# Altium PCB PCB2_2020-05-13_13-22-51.pcbdoc
Units mil, origin at the board's own origin, x right, y up, seen from the top; angles counter-clockwise.
Board outline 3580 x 4000 mil, 2 copper layers (Top Layer, Bottom Layer); 90 components, 122 nets, 302 pads, 72 vias.
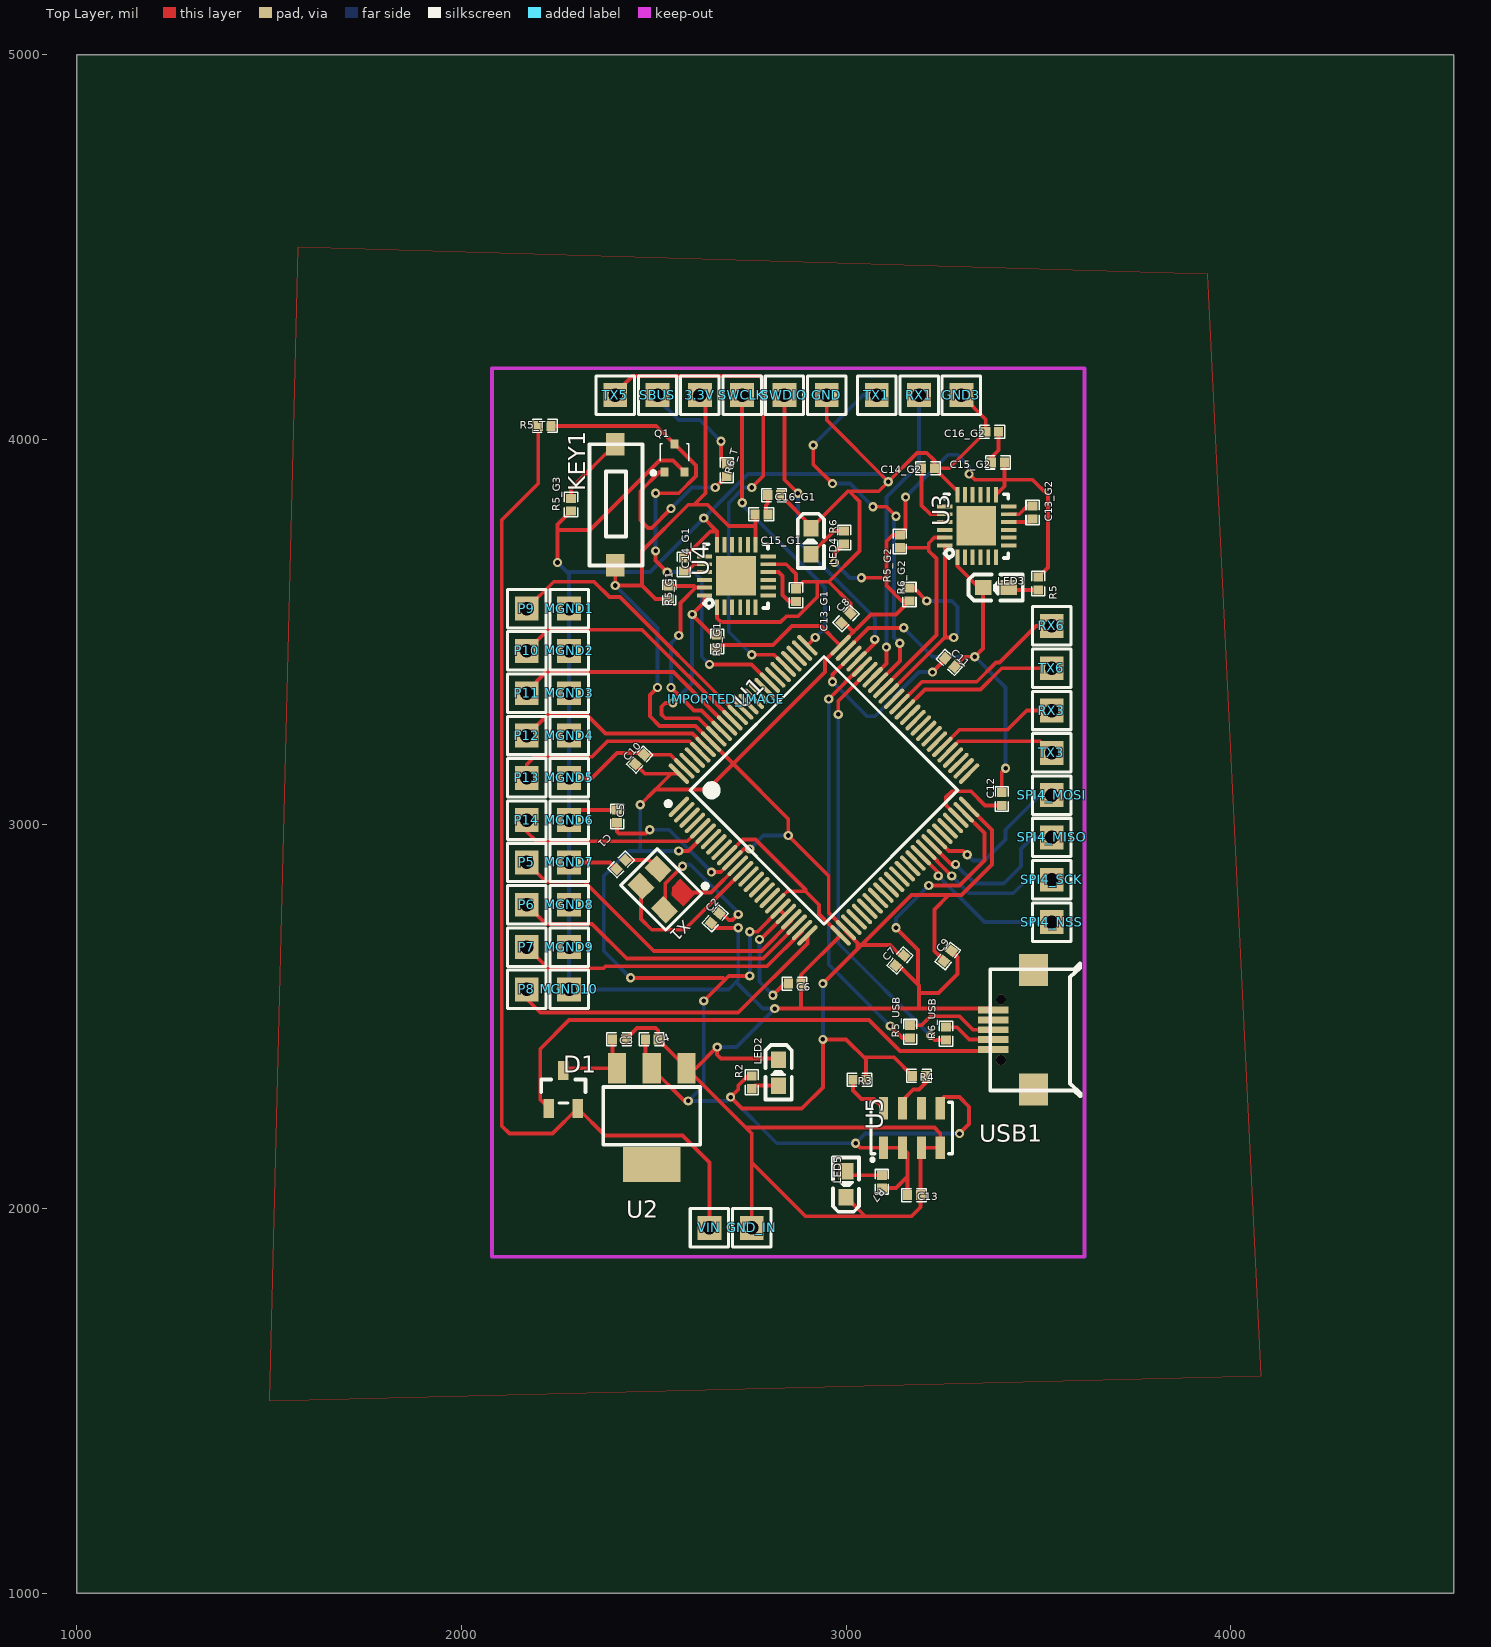
[diagram p0: Top Layer view]
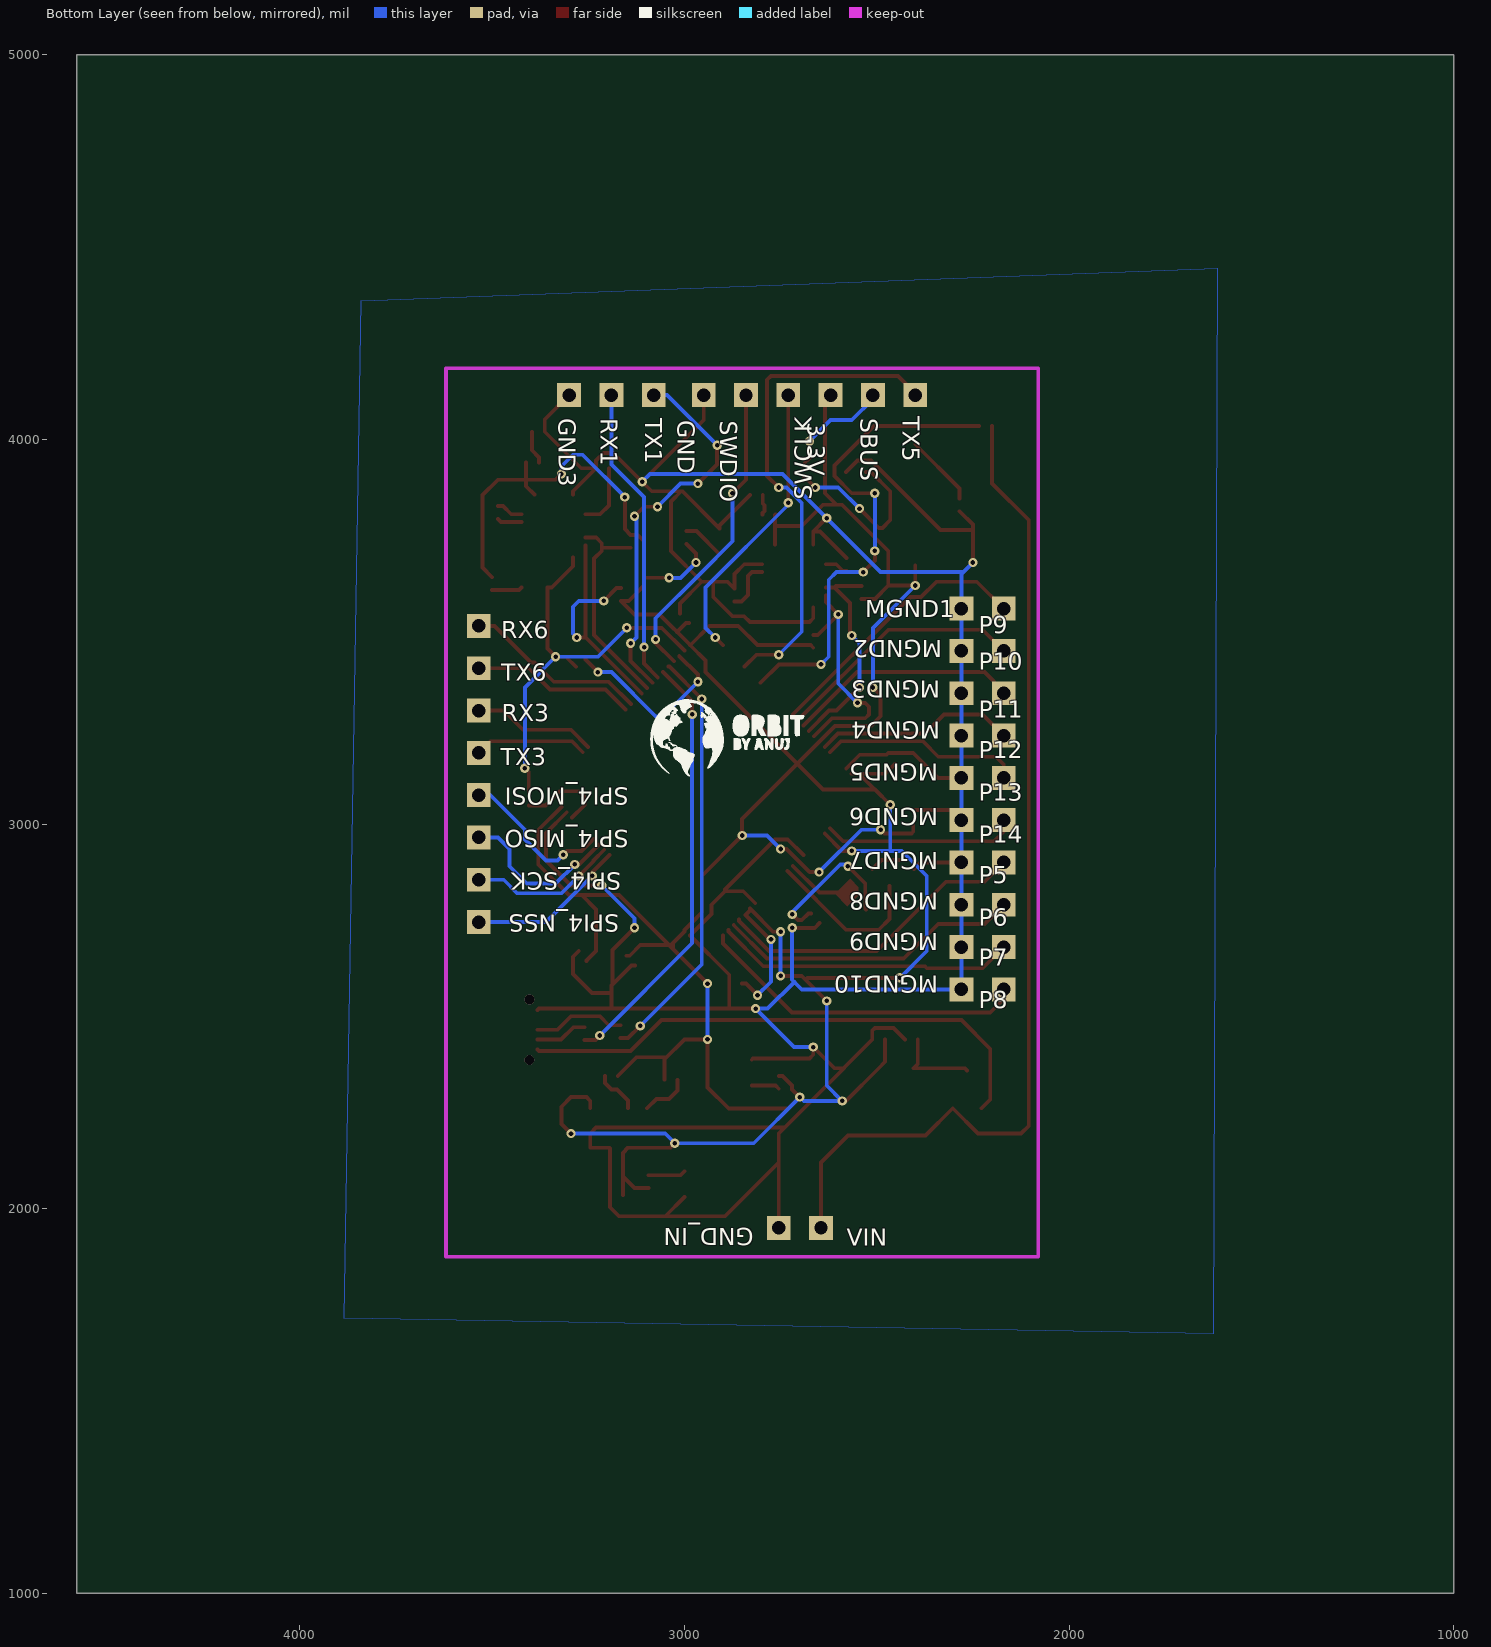
[diagram p1: Bottom Layer view, seen from below]

## Layer stack, top to bottom
Top Layer: signal copper (thickness not stored)
Dielectric: dielectric 12.6, FR-4, Dk 4.8
Bottom Layer: signal copper (thickness not stored)

## Board outline
4580,1000 1000,1000 1000,5000 4580,5000

## Components (designator, comment, footprint, x,y, rotation, side; value= is the part's Value field where it differs from the comment)
3.3V "Header-Male-2.54_1x1" HDR-1X1/2.54 2620,4115 r0 top
C1 "16pF" 0402 2415,2895 r225 top
C2 "16pF" 0402 2660,2755 r48 top
C3 "10uF" 0402 2410,2440 r0 top
C4 "10uF" 0402 2495,2440 r0 top
C5 "100nF" 0402 2405,3020 r90 top
C6 "100nF" 0402 2866.7,2585 r0 top
C7 "100nF" 0402 3140,2645 r229 top
C8 "100nF" 0402 3000,3535 r46 top
C9 "100nF" 0402 3264.72,2656.84 r52 top
C10 "100nF" 0402 2463.61,3167.79 r47 top
C11 "100nF" 0402 3270,3420 r318 top
C12 "100nF" 0402 3405,3065 r90 top
C13 "100nF" 0402 3176.7,2035 r0 top
C13_G1 "0.1uF" 0402 2870,3595 r90 top
C13_G2 "0.1uF" 0402 3485,3810 r90 top
C14_G1 "2.2uF" 0402 2578.3,3675 r90 top
C14_G2 "2.2uF" 0402 3213.3,3925 r0 top
C15_G1 "1uF" 0402 2780,3805 r0 top
C15_G2 "1uF" 0402 3395,3940 r180 top
C16_G1 "0.1uF" 0402 2813.3,3855 r0 top
C16_G2 "0.1uF" 0402 3380,4020 r180 top
D1 "BAT54C" SOT-23(SOT-23-3) 2265,2310 r0 top
GND "Header-Male-2.54_1x1" HDR-1X1/2.54 2950,4115 r0 top
GND3 "Header-Male-2.54_1x1" HDR-1X1/2.54 3300,4115 r0 top
GND_IN "Header-Male-2.54_1x1" HDR-1X1/2.54 2755,1950 r0 top
IMPORTED_IMAGE "IMPORTED_IMAGE" IMPORTED_IMAGE 2688.35,3324.09 r0 top
KEY1 "Switch,3*6*5Plastic head,260G, 0.25mm,SMD" KEY-3.0*6.0 2400,3830 r90 top
LED2 "19-213/Y2C-CQ2R2L/3T(CY)" LED-0603 2825,2353.5 r270 top
LED3 "19-213/Y2C-CQ2R2L/3T(CY)" LED-0603 3390,3615 r0 top
LED4 "19-213/Y2C-CQ2R2L/3T(CY)" LED-0603 2908.5,3735 r270 top
LED5 "19-213/Y2C-CQ2R2L/3T(CY)" LED-0603 3000,2063.5 r90 top
MGND1 "Header-Male-2.54_1x1" HDR-1X1/2.54 2280,3560 r0 top
MGND2 "Header-Male-2.54_1x1" HDR-1X1/2.54 2280,3450 r0 top
MGND3 "Header-Male-2.54_1x1" HDR-1X1/2.54 2280,3340 r0 top
MGND4 "Header-Male-2.54_1x1" HDR-1X1/2.54 2280,3230 r0 top
MGND5 "Header-Male-2.54_1x1" HDR-1X1/2.54 2280,3120 r0 top
MGND6 "Header-Male-2.54_1x1" HDR-1X1/2.54 2280,3010 r0 top
MGND7 "Header-Male-2.54_1x1" HDR-1X1/2.54 2280,2900 r0 top
MGND8 "Header-Male-2.54_1x1" HDR-1X1/2.54 2280,2790 r0 top
MGND9 "Header-Male-2.54_1x1" HDR-1X1/2.54 2280,2680 r0 top
MGND10 "Header-Male-2.54_1x1" HDR-1X1/2.54 2280,2570 r0 top
P5 "Header-Male-2.54_1x1" HDR-1X1/2.54 2170,2900 r0 top
P6 "Header-Male-2.54_1x1" HDR-1X1/2.54 2170,2790 r0 top
P7 "Header-Male-2.54_1x1" HDR-1X1/2.54 2170,2680 r0 top
P8 "Header-Male-2.54_1x1" HDR-1X1/2.54 2170,2570 r0 top
P9 "Header-Male-2.54_1x1" HDR-1X1/2.54 2170,3560 r0 top
P10 "Header-Male-2.54_1x1" HDR-1X1/2.54 2170,3450 r0 top
P11 "Header-Male-2.54_1x1" HDR-1X1/2.54 2170,3340 r0 top
P12 "Header-Male-2.54_1x1" HDR-1X1/2.54 2170,3230 r0 top
P13 "Header-Male-2.54_1x1" HDR-1X1/2.54 2170,3120 r0 top
P14 "Header-Male-2.54_1x1" HDR-1X1/2.54 2170,3010 r0 top
Q1 "BC817W" SOT-323(SC-70) 2554,3951.42 r270 top
R2 "1k" 0402 2755,2328.3 r270 top
R3 "1k" 0402 3035,2335 r0 top
R4 "1k" 0402 3190,2345 r0 top
R5 "1k" 0402 3500,3625 r270 top
R5_G1 "10k" 0402 2540,3601.7 r270 top
R5_G2 "10k" 0402 3140,3735 r90 top
R5_G3 "10k" 0402 2285,3830 r270 top
R5_T "10k" 0402 2216.7,4035 r180 top
R5_USB "22" 0402 3166.7,2460 r90 top
R6 "1k" 0402 2995,3745 r90 top
R6_G1 "10k" 0402 2665,3475 r90 top
R6_G2 "10k" 0402 3165,3596.7 r90 top
R6_T "4.7k" 0402 2690,3920 r90 top
R6_USB "22" 0402 3260,2455 r90 top
R7 "1k" 0402 3093.3,2070 r90 top
RX1 "Header-Male-2.54_1x1" HDR-1X1/2.54 3190,4115 r0 top
RX3 "Header-Male-2.54_1x1" HDR-1X1/2.54 3535,3295 r0 top
RX6 "Header-Male-2.54_1x1" HDR-1X1/2.54 3535,3515 r0 top
SBUS "Header-Male-2.54_1x1" HDR-1X1/2.54 2510,4115 r0 top
SPI4_MISO "Header-Male-2.54_1x1" HDR-1X1/2.54 3535,2965 r0 top
SPI4_MOSI "Header-Male-2.54_1x1" HDR-1X1/2.54 3535,3075 r0 top
SPI4_NSS "Header-Male-2.54_1x1" HDR-1X1/2.54 3535,2745 r0 top
SPI4_SCK "Header-Male-2.54_1x1" HDR-1X1/2.54 3535,2855 r0 top
SWCLK "Header-Male-2.54_1x1" HDR-1X1/2.54 2730,4115 r0 top
SWDIO "Header-Male-2.54_1x1" HDR-1X1/2.54 2840,4115 r0 top
TX1 "Header-Male-2.54_1x1" HDR-1X1/2.54 3080,4115 r0 top
TX3 "Header-Male-2.54_1x1" HDR-1X1/2.54 3535,3185 r0 top
TX5 "Header-Male-2.54_1x1" HDR-1X1/2.54 2400,4115 r0 top
TX6 "Header-Male-2.54_1x1" HDR-1X1/2.54 3535,3405 r0 top
U1 "STM32F746VGT6" LQFP-100_14X14X05P 2942.74,3087.62 r45 top
U2 "NCP1117ST33T3G" SOT-223_4PIN_L6.30-W7.30-PITCH4.60-BL 2495,2240 r180 top
U3 "MPU-6000QFN-24" QFN-24-TESTING 3340,3775 r90 top
U4 "MPU-6000QFN-24" QFN-24-TESTING 2715,3645 r90 top
U5 "MS5611-01BA03" QFN-8_5X3MM 3171.18,2209.61 r90 top
USB1 "Micro USB-B 5P_C40942" MICRO-USB-12 3435,2465 r180 top
VIN "Header-Male-2.54_1x1" HDR-1X1/2.54 2645,1950 r0 top
X1 "Zhejiang" OSC-SMD_4P-L3.2-W2.5-BL 2520,2830 r135 top

## Footprints (in the part's own frame and the unit in brackets; to place one, negate y for a bottom-side part, rotate by r counter-clockwise, add the part's x,y. Pads: shape width x height; smd on the part's side, far side on the other; paste and mask are expansions set on the pad)
0402 [mil]
  rect 23.62x25.58 smd: 1(-16.7,0) 2(16.7,0)
  silkscreen extent -32,-17 32,17
HDR-1X1/2.54 [mil]
  rect 62x62 hole 35: 1(0,0)
  silkscreen extent -50,-50 50,50
IMPORTED_IMAGE [mil]
KEY-3.0*6.0 [mil]
  rect 59.06x47.24 smd: 1(-157.5,0) 2(157.5,0)
  silkscreen extent -158,-71 157,67
LED-0603 [mil]
  rect 43x39 smd: 1(33.5,0) 2(-33.5,0)
  silkscreen extent -72,-34 70,34
LQFP-100_14X14X05P [mm]
  oval 1.796x0.28 smd: 1(-7.55,6) 2(-7.55,5.5) 3(-7.55,5) 4(-7.55,4.5) 5(-7.55,4) 6(-7.55,3.5) 7(-7.55,3) 8(-7.55,2.5) 9(-7.55,2) 10(-7.55,1.5) 11(-7.55,1) 12(-7.55,0.5) 13(-7.55,0) 14(-7.55,-0.5) 15(-7.55,-1) 16(-7.55,-1.5) 17(-7.55,-2) 18(-7.55,-2.5) 19(-7.55,-3) 20(-7.55,-3.5) 21(-7.55,-4) 22(-7.55,-4.5) 23(-7.55,-5) 24(-7.55,-5.5) 25(-7.55,-6) 51(7.55,-6) 52(7.55,-5.5) 53(7.55,-5) 54(7.55,-4.5) 55(7.55,-4) 56(7.55,-3.5) 57(7.55,-3) 58(7.55,-2.5) 59(7.55,-2) 60(7.55,-1.5) 61(7.55,-1) 62(7.55,-0.5) 63(7.55,0) 64(7.55,0.5) 65(7.55,1) 66(7.55,1.5) 67(7.55,2) 68(7.55,2.5) 69(7.55,3) 70(7.55,3.5) 71(7.55,4) 72(7.55,4.5) 73(7.55,5) 74(7.55,5.5) 75(7.55,6)
  oval 0.28x1.796 smd: 26(-6,-7.55) 27(-5.5,-7.55) 28(-5,-7.55) 29(-4.5,-7.55) 30(-4,-7.55) 31(-3.5,-7.55) 32(-3,-7.55) 33(-2.5,-7.55) 34(-2,-7.55) 35(-1.5,-7.55) 36(-1,-7.55) 37(-0.5,-7.55) 38(0,-7.55) 39(0.5,-7.55) 40(1,-7.55) 41(1.5,-7.55) 42(2,-7.55) 43(2.5,-7.55) 44(3,-7.55) 45(3.5,-7.55) 46(4,-7.55) 47(4.5,-7.55) 48(5,-7.55) 49(5.5,-7.55) 50(6,-7.55) 76(6,7.55) 77(5.5,7.55) 78(5,7.55) 79(4.5,7.55) 80(4,7.55) 81(3.5,7.55) 82(3,7.55) 83(2.5,7.55) 84(2,7.55) 85(1.5,7.55) 86(1,7.55) 87(0.5,7.55) 88(0,7.55) 89(-0.5,7.55) 90(-1,7.55) 91(-1.5,7.55) 92(-2,7.55) 93(-2.5,7.55) 94(-3,7.55) 95(-3.5,7.55) 96(-4,7.55) 97(-4.5,7.55) 98(-5,7.55) 99(-5.5,7.55) 100(-6,7.55)
  silkscreen extent -8.05,-6.25 6.25,6.8
MICRO-USB-12 [mm]
  rect 1.9x2.098 smd: 0(-1.335,3.95) 0(-1.335,-3.95)
  rect 2.002x0.452 smd: 1(1.335,1.3) 2(1.335,0.65) 3(1.335,0) 4(1.335,-0.65) 5(1.335,-1.3)
  round 0.65 hole 0.65 unplated: ""(0.814,1.999) ""(0.814,-1.999)
  silkscreen extent -4.46,-4.38 1.53,4.37
OSC-SMD_4P-L3.2-W2.5-BL [mm]
  round 0 smd: 1(-1.1,-0.8)
  rect 1.4x1.15 smd: 2(1.1,-0.8) 3(1.1,0.8) 4(-1.1,0.8)
  Top Layer region: -1.8,-0.225 -0.762,-0.225 -0.4,-0.604 -0.4,-1.375 -1.8,-1.375
  silkscreen extent -2.1,-2.35 2.1,1.7
QFN-8_5X3MM [mm]
  rect 1.5x0.6 smd: 1(-1.3,1.875) 2(-1.3,0.625) 3(-1.3,-0.625) 4(-1.3,-1.875) 5(1.3,-1.875) 6(1.3,-0.625) 7(1.3,0.625) 8(1.3,1.875)
  silkscreen extent -2.18,-2.7 1.7,2.7
QFN-24-TESTING [mil]
  rect 40x10 smd: 1(-81.5,50) 2(-81.5,31) 3(-81.5,11) 4(-81.5,-10) 5(-81.5,-30) 6(-81.5,-50) 13(81.5,-50) 14(81.5,-30) 15(81.5,-10) 16(81.5,11) 17(81.5,31) 18(81.5,50)
  rect 10x40 smd: 7(-50.5,-83) 8(-30.5,-83) 9(-10.5,-83) 10(10.5,-83) 11(30.5,-83) 12(50.5,-83) 19(50.5,83) 20(30.5,83) 21(10.5,83) 22(-10.5,83) 23(-30.5,83) 24(-50.5,83)
  rect 103x103 smd: P$1(0.5,1)
  silkscreen extent -84,-82 82,84
SOT-23(SOT-23-3) [mm]
  rect 0.7x1.25 smd: 1(-0.95,-1.25) 2(0.95,-1.25) 3(0,1.25)
  silkscreen extent -1.46,-0.9 1.46,0.65
SOT-223_4PIN_L6.30-W7.30-PITCH4.60-BL [mm]
  rect 1.2x2 smd: 1(-2.3,-3.175) 2(0,-3.175) 3(2.3,-3.175)
  rect 3.8x2.3 smd: 4(0,3.175)
  silkscreen extent -3.2,-1.93 3.2,1.87
SOT-323(SC-70) [mil]
  rect 23.63x21.66 smd: 1(36.42,-26) 2(36.42,26)
  rect 23.62x21.66 smd: 3(-36.42,0)
  silkscreen extent -37,-60 44,37

## Via types
v1: diameter 24, hole 12, Top Layer to Bottom Layer, 72 vias

## Nets (pads, with @x,y where several pads share a name; then routed paths per layer and width w, separated by ;. In a path a pad name is that pad's centre, name@x,y a point inside that pad or via, vN(x,y) a via of type N, cw(c..) or ccw(c..) an arc to the next point about the centre after c; other vN are vias at no path point)
3.3V_OUT: 3.3V.1 C4.1 C5.1 C6.1 C7.1 C8.1 C9.1 C10.1 C13.1 C15_G1.1 C15_G2.1 KEY1.1 R2.1 R3.2 R4.1 R5.1 R5_G1.2 R5_G2.2 R6.1 R6_G1.1 R6_G2.1 R7.1 U1.6 U1.11 U1.20 U1.21 U1.27 U1.50 U1.75 U1.94 U1.100 U2.2 U3.13 U4.13 U5.1 U5.2 U5.5 | length 11342.2
  Top Layer w10: KEY1.1 v1(2400,3620) 2470,3620 ; C5.1 2405,2980 2410,2975 2480,2975 v1(2490,2985) ; v1(2440,2600) 2680.74,2600 2685.37,2595.37 ; C10.1 2477.03,3130.77 U1.100 2545.77,3130.77 v1(2465,3050) 2505,3090 2640,3090 2945,3395 2945,3425 2984.83,3464.83 U1.75 2985.89,3465.89 3065,3545 3130,3545 R6_G2.1 3145,3580 3105,3620 3105,3735 3121.7,3751.7 R5_G2.2 3155,3766.7 v1(3155,3850) ; C4.1 2478.3,2381.7 U2.2 2580,2280 v1(2590,2280) ; v1(2510,3355) 2490,3335 2490,3280 2515,3255 2608.3,3255 U1.94 ; R5_G1.2 2505,3585 2470,3620 ; v1(2565,2930) 2590.24,2930 U1.6 ; 2605,3830 2635,3860 2635,4100 3.3V.1 ; v1(2630,2540) 2695,2605 v1(2750,2605) ; U1.94 2705.85,3157.47 ; v1(2650,2875) 2674.44,2875 U1.11 2734.44,2935 v1(2750,2935) ; R6_G1.1 2671.7,3465 2810,3465 2860,3515 2934.7,3515 U1.75@2984.8,3464.8 ; 2707.47,3157.47 2705.85,3157.47 ; v1(2750,2720) 2770,2720 U1.20@2827.3,2777.4 ; R2.1 2745,2345 2720,2320 2720,2310 v1(2700,2290) 2730,2260 2885,2260 2940,2315 v1(2940,2440) 3000,2440 3051.7,2388.3 R3.2 ; C15_G1.1 2765,3803.3 U4.13 ; 2765,3775.2 2695.2,3775.2 2640,3830 2590,3830 2470,3710 2470,3620 ; v1(2775,2700) 2777.71,2700 2841.18,2763.46 2830,2774.64 U1.20 ; v1(2810,2555) 2840,2585 C6.1 ; v1(2940,2585) 3030,2675 ; v1(2970,3680) 2970,3703.3 R6.1 ; C8.1 2995.62,3522.99 3019.31,3499.31 ; v1(3025,2170) 3036.57,2158.43 U5.1 U5.2 3160,2145 C13.1 ; v1(3040,3640) 3105,3640.6 ; 3046.28,2393.72 3124.59,2393.72 R4.1 ; R7.1 3129.62,2053.3 3160,2083.68 ; C7.1 3142.4,2657.6 3115,2685 3035,2685 U1.27@2999.8,2720.2 ; U5.5 3245,2280 3255,2290 3295,2290 3320,2265 3320,2220 v1(3295,2195) ; C9.1 3254.44,2645.56 3230,2670 3230,2777.89 3267.11,2815 ; U1.50 3380,2984.5 3380,2895 3300,2815 3170,2815 3030,2675 ; v1(3320,3910) 3335,3895 3485,3895 3525,3855 3525,3666.7 R5.1 ; U3.13 3411.7,3878.2 C15_G2.1 ; 2705.85,3157.47 2850,3013.33 v1(2850,2970) 2955,2865 2955,2770 2977.6,2746.6 U1.27 U1.27@2999.8,2720.2 ; U1.27@2999.8,2720.2 3030,2690 3030,2675
  Bottom Layer w10: v1(2400,3620) 2510,3510 v1(2510,3355) ; v1(2440,2600) 2370,2670 2370,2865 2435,2930 v1(2565,2930) ; 2463.41,2930 2465,2931.59 v1(2465,3050) ; v1(2490,2985) 2540,2985 v1(2650,2875) ; v1(2630,2540) 2630,2440 2630,2320 v1(2590,2280) 2690,2280 v1(2700,2290) 2820,2170 v1(3025,2170) 3050,2195 v1(3295,2195) ; v1(2750,2605) v1(2750,2720) ; v1(2750,2935) 2785,2970 v1(2850,2970) ; v1(2775,2700) 2775,2590 v1(2810,2555) ; v1(2940,2440) v1(2940,2585) ; v1(2970,3680) 3010,3640 v1(3040,3640) ; v1(3155,3850) 3265,3960 3290,3960 3320,3930 v1(3320,3910)
5V_USB: D1.1 D1.2 R5_T.2 USB1.1 VIN.1 | length 4070
  Top Layer w10: R5_T.2 2200,3885 2105,3790 2105,2215 2125,2195 2236.6,2195 D1.2 2373.2,2190 2575,2190 2645,2120 VIN.1 ; D1.1 2205,2283.4 2205,2415 2280,2490 3060,2490 3140,2410 3378.7,2410 USB1.1@3382.5,2413.8
BUZZ: U1.17
C13_G2_1: C13_G2.1 U3.10 | length 65.2
  Top Layer w10: U3.10 3477.2,3785.5 C13_G2.1
C14_G2_1: C14_G2.1 U3.20 | length 166.5
  Top Layer w10: C14_G2.1 3196.6,3828.4 3219.5,3805.5 U3.20
C15_G1_2: C15_G1.2 C16_G1.1 | length 54.1
  Top Layer w10: C16_G1.1 2796.6,3833.2 2791.7,3828.3 2791.7,3813.3 2796.7,3808.3 C15_G1.2
C16_G2_1: C15_G2.2 C16_G2.1 | length 87.6
  Top Layer w10: C15_G2.2 3378.3,3953.3 3396.7,3971.7 C16_G2.1
CAN_RX: U1.81
CAN_TX: U1.82
GND: C1.2 C2.1 C3.2 C4.2 C5.2 C6.2 C7.2 C8.2 C9.2 C10.2 C11.2 C12.2 C13.2 C13_G1.2 C13_G2.2 C14_G1.2 C14_G2.2 C16_G1.2 C16_G2.2 GND3.1 GND.1 GND_IN.1 LED2.2 LED3.2 LED4.2 LED5.2 MGND1.1 MGND2.1 MGND3.1 MGND4.1 MGND5.1 MGND6.1 MGND7.1 MGND8.1 MGND9.1 MGND10.1 Q1.2 R5_G3.2 U1.10 U1.19 U1.26 U1.49 U1.74 U1.99 U2.1 U3.1 U3.11 U3.18 U4.1 U4.11 U4.18 U5.3 U5.4 USB1.5 | length 12492.7
  Top Layer w10: v1(2250,3680) 2250,3778.3 R5_G3.2 ; 2250,3764.5 2334.5,3764.5 2515,3945 2550,3945 Q1.2 ; MGND7.1 2386.38,2900 C1.2 ; MGND6.1 2306.7,3036.7 C5.2 ; MGND5.1 2340,3120 2405,3185 2470,3185 C10.2 2544.13,3180 U1.99 ; C3.2 2456.7,2470 2505,2470 2511.7,2463.3 C4.2 2585.55,2366.15 U2.1 ; C14_G1.2 2647.21,3760.61 2665,3760.61 ; v1(2630.31,3795.31) 2665,3760.61 ; C2.1 2661.42,2730 v1(2720,2730) ; U4.1 2665,3535 2675,3525 2830,3525 2845,3540 2875,3540 2925.3,3590.3 2925.3,3630 ; U4.18 2665,3760.61 ; U1.10 2731.6,2960 2765,2960 2895,2830 2895,2825 ; 2739.8,2210.7 3230,2210.7 3245,2195 U5.4 ; GND_IN.1 2755,2195.55 U2.1 ; 2755,2116.5 2758.5,2116.5 2895,1980 3051.5,1980 ; U4.11 2844.5,3675.5 2870,3650 C13_G1.2 2888.3,3630 2955,3630 ; v1(2815,2520) 2866.2,2520 3378.65,2520 USB1.5@3382.45,2516.2 ; U1.19 2847.15,2825 2895,2825 ; LED2.2 2822,2390 2675,2390 2665,2400 v1(2665,2420) 2610,2365 U2.1 ; C16_G1.2 2908.5,3776.5 LED4.2 3005,3865 3085,3865 v1(3110,3890) ; 2886,2520 2883.4,2522.6 C6.2 2883.4,2607.92 U1.26 2930,2766.3 2930,2790 2895,2825 ; GND.1 2950,4050 v1(3110,3890) ; U1.74 3058.89,3510 v1(3150,3510) ; LED5.2 3050,1980 3170,1980 3193.4,2003.4 C13.2 3193.4,2156.04 U5.3 U5.4 ; 3008.4,3865 3035,3838.4 3035,3710 2955,3630 ; C8.2 3011.6,3573.4 2955,3630 ; C7.2 3137.6,2632.4 3190,2580 3190,2522.99 3187.01,2520 ; v1(3130,2730) 3187.34,2672.66 3187.34,2582.66 ; 3190,2560.59 3240.59,2560.59 3290,2610 3290,2655 C9.2 ; v1(3215,2840) 3295,2840 3360,2905 3360,2976.59 U1.49 ; C11.2 3308.59,3435 v1(3335,3435) 3356.5,3456.5 LED3.2 3345,3615 3290,3670 U3.1 ; U3.18 3290,3865 C14_G2.2 ; GND3.1 3363.3,4051.7 C16_G2.2 3268.3,3925 C14_G2.2 ; C12.2 3405,3135 v1(3415,3145) ; U3.11 3450.5,3805.5 3471.7,3826.7 C13_G2.2 ; v1(3110,3890) 3185,3965 3210,3965 3230,3945 C14_G2.2
  Bottom Layer w10: v1(2665,2420) 2715,2420 v1(2815,2520) 2783.63,2520 2714.32,2589.31 ; v1(2720,2730) 2720,2595 2695,2570 MGND10.1 MGND9.1 MGND8.1 MGND7.1 MGND6.1 MGND5.1 MGND4.1 MGND3.1 MGND2.1 MGND1.1 2280,3650 v1(2250,3680) 2275,3655 2490,3655 2745,3910 3090,3910 v1(3110,3890) ; v1(3130,2730) 3130,2755 v1(3215,2840) ; v1(3150,3510) 3225,3435 v1(3335,3435) 3415,3355 v1(3415,3145)
KEY1_2: KEY1.2 R5_G3.1 | length 188.4
  Top Layer w10: R5_G3.1 2285,3872.5 KEY1.2
LED3_1: LED3.1 R5.2 | length 79.3
  Top Layer w10: LED3.1 3430.2,3608.3 R5.2
OSC_IN: U1.12 X1.1 | length 174.6
  Top Layer w10: X1.1 2648.93,2821.65 U1.12
OSC_OUT: U1.13 X1.3 | length 425.6
  Top Layer w10: X1.3 2467.1,2752.9 2495,2725 2580.12,2725 U1.13
PWM1_M: P5.1 U1.22 | length 819.7
  Top Layer w10: P5.1 2220,2850 2320,2850 2500,2670 2780,2670 2857.8,2747.8 U1.22
PWM2_M: P6.1 U1.23 | length 797.1
  Top Layer w10: P6.1 2220,2740 2340,2740 2430,2650 2785,2650 2871.7,2736.8 U1.23@2871.7,2738.2
PWM3_M: P7.1 U1.24 | length 781.7
  Top Layer w10: P7.1 2225,2625 2370,2625 2375,2630 2795,2630 2885.7,2720.7 U1.24
PWM4_M: P8.1 U1.25 | length 864.3
  Top Layer w10: P8.1 2170,2545 2205,2510 2720,2510 2899.59,2689.59 U1.25
PWM5_M: P9.1 U1.89 | length 721
  Top Layer w10: P9.1 2240,3630 2345,3630 2385,3590 2412.52,3590 U1.89
PWM6_M: P10.1 U1.90 | length 654.9
  Top Layer w10: P10.1 2225,3505 2469.68,3505 U1.90
PWM7_M: P11.1 U1.91 | length 604.1
  Top Layer w10: P11.1 2170,3345 2220,3395 2551.84,3395 U1.91
PWM8_M: P12.1 U1.95 | length 523
  Top Layer w10: P12.1 2225,3285 2325,3285 2375,3235 2600.48,3235 U1.95
PWM9_M: P13.1 U1.96 | length 522.9
  Top Layer w10: P13.1 2170,3155 2190,3175 2340,3175 2380,3215 2592.7,3215 U1.96@2621.2,3186.5
PWM10_M: P14.1 U1.5 | length 505.6
  Top Layer w10: P14.1 2170,2980 2195,2955 2587.42,2955 U1.5
Q1_1: Q1.1 R6_T.1 | length 447.2
  Top Layer w10: Q1.1 2515,3915 2465,3865 2465,3790 2485,3770 2495,3770 v1(2545,3820) ; v1(2660,3875) 2688.3,3903.3 R6_T.1
  Bottom Layer w10: v1(2545,3820) 2600,3875 v1(2660,3875)
R2_2: LED2.1 R2.2 | length 73.5
  Top Layer w10: R2.2 2763.4,2320 LED2.1
R6_2: LED4.1 R6.2 | length 111.4
  Top Layer w10: LED4.1 2968.7,3761.7 R6.2
R7_2: LED5.1 R7.2 | length 97.6
  Top Layer w10: LED5.1 3010.3,2086.7 R7.2
RX1: RX1.1 U1.69 | length 783.6
  Top Layer w10: U1.69 3105,3416.91 v1(3105,3460)
  Bottom Layer w10: v1(3105,3460) 3105,3850 3190,3935 RX1.1
RX3: RX3.1 U1.56 | length 323.8
  Top Layer w10: U1.56 3295,3245 3420,3245 3470,3295 RX3.1
RX5: Q1.3 R5_T.1 U1.83 | length 1290.7
  Top Layer w10: R5_T.1 2506.8,4035 Q1.3 2610,3931.8 2610,3905 2565,3860 v1(2505,3860) ; v1(2505,3710) 2505,3685 v1(2535,3655) ; v1(2645,3415) 2754.56,3415 U1.83
  Bottom Layer w10: v1(2505,3710) v1(2505,3860) ; v1(2535,3655) 2605,3655 2625,3635 2625,3435 v1(2645,3415)
RX6: RX6.1 U1.64 | length 480.2
  Top Layer w10: U1.64 3197.29,3370 3340,3370 3390,3420 3399.33,3420 3494.33,3515 RX6.1
S$22: 
SBUS: R6_T.2 SBUS.1 | length 285.1
  Top Layer w10: v1(2675,3995) 2675,3951.7 R6_T.2
  Bottom Layer w10: SBUS.1 2510,4105 2565,4050 2620,4050 v1(2675,3995)
SCL1: R5_G1.1 U1.92 U4.23 | length 558.5
  Top Layer w10: R5_G1.1 2605.6,3618.4 2609.5,3614.5 ; v1(2545,3355) 2605,3295 2624,3295 U1.92 ; v1(2565,3490) 2570,3495 2570,3575 2609.5,3614.5 ; U4.23 2609.5,3614.5
  Bottom Layer w10: v1(2545,3355) 2545,3470 v1(2565,3490)
SCL2: R3.1 U1.47 U5.8 | length 126.4
  Top Layer w10: R3.1 3018.3,2306.7 3040,2285 3073.1,2285 U5.8
SCL3: R5_G2.1 U1.67 U3.23 | length 564.9
  Top Layer w10: U1.67 3235,3491.23 3235,3690 3215,3710 3215,3730 3229.5,3744.5 U3.23 ; R5_G2.1 3215,3718.1
SDA1: R6_G1.2 U1.93 U4.24 | length 621.2
  Top Layer w10: v1(2550,3315) 2530,3315 2520,3305 2520,3285 2530,3275 2616.2,3275 U1.93 ; U4.24 2632,3577 v1(2600,3545) 2653.3,3491.7 R6_G1.2
  Bottom Layer w10: v1(2550,3315) 2600,3365 v1(2600,3545)
SDA2: R4.2 U1.46 U5.7 | length 117.9
  Top Layer w10: U5.7 3146.57,2281.57 3175,2310 3190,2310 3206.7,2326.7 R4.2
SDA3: R6_G2.2 U1.66 U3.24 | length 697.7
  Top Layer w10: U1.66 3257,3485.4 ; R6_G2.2 3176.6,3613.4 v1(3210,3580) ; U3.24 3257,3485.4 ; v1(3280,3485) 3257.4,3485 3257,3485.4
  Bottom Layer w10: v1(3210,3580) 3275,3580 3290,3565 3290,3495 v1(3280,3485)
SPI4_MISO: SPI4_MISO.1 U1.43 | length 430.8
  Top Layer w10: U1.43 3274.57,2895 v1(3285,2895)
  Bottom Layer w10: v1(3285,2895) 3335,2845 3410,2845 3455,2890 3455,2935 3485,2965 SPI4_MISO.1
SPI4_MOSI: SPI4_MOSI.1 U1.44 | length 406.8
  Top Layer w10: U1.44 3267.39,2930 3305,2930 v1(3315,2920)
  Bottom Layer w10: v1(3315,2920) 3330,2905 3360,2905 3415,2960 3415,2985 3505,3075 SPI4_MOSI.1
SPI4_NSS: SPI4_NSS.1 U1.41 | length 417.7
  Top Layer w10: U1.41 3240,2873.88 v1(3240,2865)
  Bottom Layer w10: v1(3240,2865) 3360,2745 SPI4_NSS.1
SPI4_SCK: SPI4_SCK.1 U1.42 | length 388.7
  Top Layer w10: U1.42 3236.7,2905 3236.7,2903.3 v1(3275,2865)
  Bottom Layer w10: v1(3275,2865) 3320,2820 3435,2820 3470,2855 SPI4_SCK.1
TX1: TX1.1 U1.68 | length 1007.1
  Top Layer w10: v1(2915,3985) 2915,3935 v1(2965,3885) ; v1(3070,3825) 3105,3825 v1(3130,3800) ; U1.68 3140,3424.08 v1(3140,3470)
  Bottom Layer w10: v1(2915,3985) 3045,4115 TX1.1 ; v1(2965,3885) 3010,3885 v1(3070,3825) ; v1(3130,3800) 3125,3800 3125,3485 v1(3140,3470)
TX3: TX3.1 U1.55 | length 295
  Top Layer w10: U1.55 3292.8,3215 3505,3215 TX3.1
TX5: TX5.1 U1.80 | length 1303.3
  Top Layer w10: TX5.1 2400,4120 2445,4165 2775,4165 2785,4155 2785,3905 v1(2755,3875) ; v1(2755,3440) 2813.07,3440 U1.80
  Bottom Layer w10: v1(2755,3440) 2695,3500 2695,3835 2735,3875 v1(2755,3875)
TX6: TX6.1 U1.63 | length 426.5
  Top Layer w10: U1.63 3205.12,3350 3350,3350 3405,3405 TX6.1
U1_1: U1.1
U1_2: U1.2
U1_3: U1.3
U1_4: U1.4
U1_7: U1.7
U1_8: U1.8
U1_9: U1.9
U1_14: U1.14
U1_15: U1.15
U1_16: U1.16
U1_18: U1.18
U1_28: U1.28
U1_29: U1.29
U1_30: U1.30
U1_31: U1.31
U1_32: U1.32
U1_33: U1.33
U1_34: U1.34
U1_35: U1.35
U1_36: U1.36
U1_37: U1.37
U1_38: U1.38
U1_39: U1.39
U1_40: U1.40
U1_45: U1.45
U1_48: C12.1 U1.48 | length 233.1
  Top Layer w10: U1.48 3260,3048.75 3260,3070 3275,3085 3325,3085 3361.7,3048.3 C12.1
U1_51: U1.51
U1_52: U1.52
U1_53: U1.53
U1_54: U1.54
U1_57: U1.57
U1_58: U1.58
U1_59: U1.59
U1_60: U1.60
U1_61: U1.61
U1_62: U1.62
U1_65: U1.65
U1_72: SWDIO.1 U1.72 | length 808.9
  Top Layer w10: SWDIO.1 2840,3895 v1(2875,3860) ; U1.72 3075,3470.44 v1(3075,3480)
  Bottom Layer w10: v1(2875,3860) 2875,3735 2960,3650 3075,3535 v1(3075,3480)
U1_73: C11.1 U1.73 | length 481.8
  Top Layer w10: v1(2965,3370) 2965,3388.27 U1.73 ; v1(3225,3395) 3257.59,3427.59 C11.1
  Bottom Layer w10: v1(2965,3370) 3055,3280 3075,3280 3190,3395 v1(3225,3395)
U1_76: SWCLK.1 U1.76 | length 758.2
  Top Layer w10: v1(2730,3835) SWCLK.1 ; U1.76 2919.76,3485 v1(2920,3485)
  Bottom Layer w10: v1(2730,3835) 2730,3830 2945,3615 2945,3510 v1(2920,3485)
U1_77: U1.77
U1_78: U1.78
U1_79: U1.79
U1_84: U1.84
U1_85: U1.85
U1_86: U1.86
U1_87: U1.87
U1_88: U1.88
U1_97: U1.97
U1_98: U1.98
U2_3: C3.1 D1.3 U2.3 | length 221.5
  Top Layer w10: D1.3 2270.8,2365 U2.3 2393.3,2376.15 C3.1
U2_4: U2.4
U3_6: U3.6
U3_7: U3.7
U3_8: U3.8
U3_9: U3.9
U3_12: U3.12
U3_22: U3.22
U4_6: U4.6
U4_7: U4.7
U4_8: U4.8
U4_9: U4.9
U4_10: C13_G1.1 U4.10 | length 133.3
  Top Layer w10: U4.10 2824.5,3655.5 2835,3645 2835,3595 2851.7,3578.3 C13_G1.1
U4_12: U4.12
U4_20: C14_G1.1 U4.20 | length 60.8
  Top Layer w10: C14_G1.1 2588.3,3658.3 2605.5,3675.5 U4.20
U4_22: U4.22
U5_6: U5.6
USB1_2: R6_USB.2 USB1.2 | length 135.8
  Top Layer w10: R6_USB.2 3288.3,2471.7 3320.6,2439.4 USB1.2@3382.45,2439.4
USB1_3: R5_USB.2 USB1.3 | length 239.9
  Top Layer w10: R5_USB.2 3196.7,2476.7 3220,2500 3295,2500 3330,2465 USB1.3
USB1_4: USB1.4
USB_DMINUS: R6_USB.1 U1.70 | length 1120.8
  Top Layer w10: v1(2980,3285) 2980,3319.76 U1.70 ; v1(3220,2450) 3231.7,2438.3 R6_USB.1
  Bottom Layer w10: v1(2980,3285) 2980,2815 2980,2690 v1(3220,2450)
USB_DPLUS: R5_USB.1 U1.71 | length 1102.5
  Top Layer w10: v1(2955,3325) 3039.16,3409.16 U1.71 ; v1(3115,2475) 3146.7,2443.3 R5_USB.1
  Bottom Layer w10: v1(2955,3325) 2955,2635 v1(3115,2475)
X1_2: C1.1 X1.2 | length 94.7
  Top Layer w10: C1.1 2487.74,2906.81 X1.2
X1_4: C2.2 X1.4 | length 398.3
  Top Layer w10: X1.4 2530,2778.75 2530,2845 v1(2575,2890) ; C2.2 2677.59,2767.41 2695,2750 2705,2750 v1(2720,2765)
  Bottom Layer w10: v1(2575,2890) 2580,2895 2595,2895 2720,2770 v1(2720,2765)
pads on no net: U3.2 U3.3 U3.4 U3.5 U3.14 U3.15 U3.16 U3.17 U3.19 U3.21 U3.P$1 U4.2 U4.3 U4.4 U4.5 U4.14 U4.15 U4.16 U4.17 U4.19 U4.21 U4.P$1 USB1. USB1.0

## Polygon pours and split planes (outlines as drawn)
GND on Bottom Layer (solid): 3840,4360 1615,4445 1625,1675 3885,1715
GND on Top Layer (solid): 3940,4430 1575,4500 1500,1500 4080,1565

## Text inside footprints (layer, text, board x,y; h text height)
U3: Document "Y" at 3285,3750.5 h30 r270; Document "X" at 3308,3817.5 h30 r270; Document "Z" at 3350.4,3691.4 h30 r270
U4: Document "Y" at 2689,3625.88 h30 r111; Document "X" at 2683,3687.5 h30 r270; Document "Z" at 2723,3640.5 h30 r270